# Altium PCB ESP32 with USBC PCB V1.PcbDoc (part 3 of 3)
Units mil, origin at the board's own origin, x right, y up, seen from the top; angles counter-clockwise.
Board outline 2800 x 1000 mil, 4 copper layers (L1, L2, L3, L4), stack 61.583 mil thick; 64 components, 73 nets, 299 pads, 158 vias.
Unrouted connection lines stored in the file: 2.
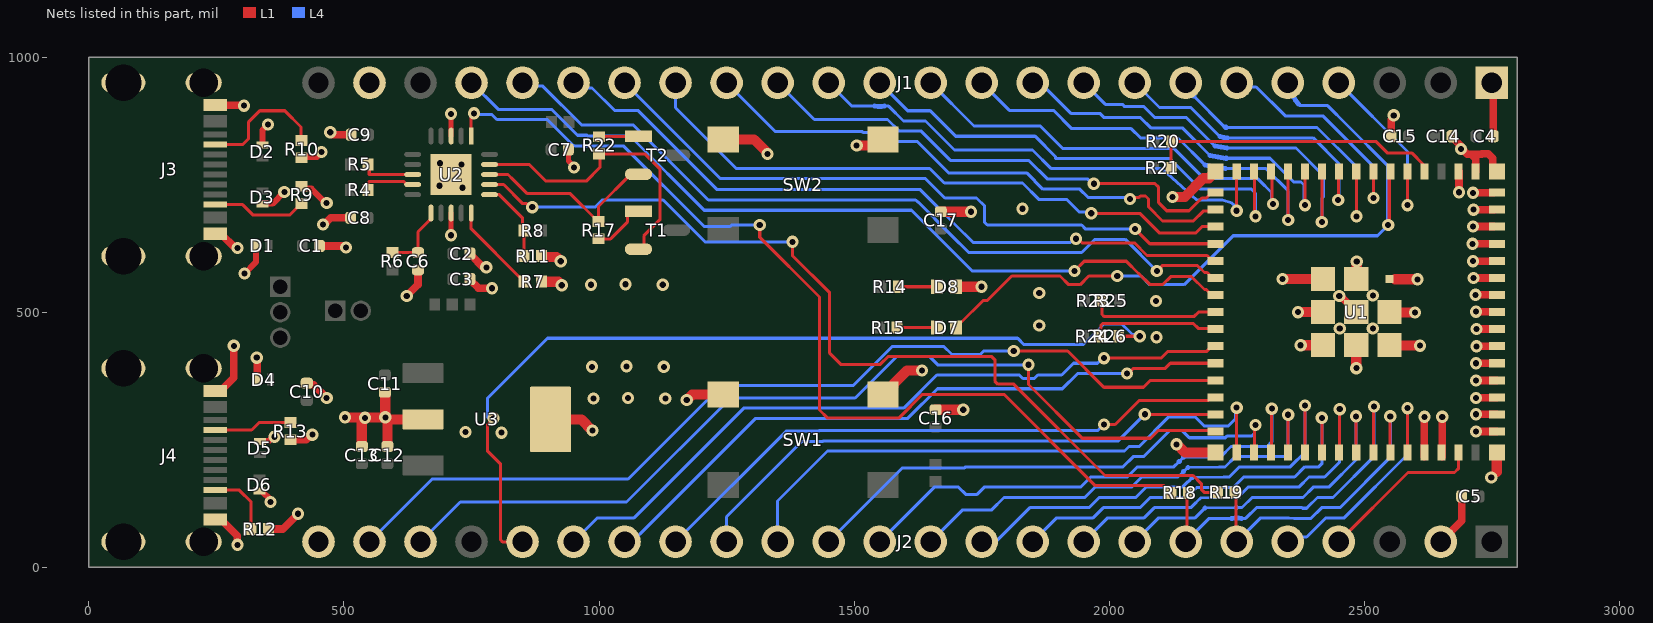
[diagram p4: the nets of this part, all layers, seen from the top]

## Via types
v1: diameter 24, hole 12, L1 to L4, tented both sides, 158 vias

## Nets (pads, with @x,y where several pads share a name; then routed paths per layer and width w, separated by ;. In a path a pad name is that pad's centre, name@x,y a point inside that pad or via, vN(x,y) a via of type N, cw(c..) or ccw(c..) an arc to the next point about the centre after c; other vN are vias at no path point) (continued)
CON_ESP_USB_P: J2.20 R26.1 | length 1733.6
  L1 w6.03: v1(793,292) 793,290.97 781.51,279.48 781.51,227.49 807.01,201.99 807.01,53.53 810.55,50 J2.20@850,50 ; R26.1@2021,453 v1(2059.98,453)
  L4 w6.03: 781,294.03 781,331 899.01,449.01 1820.53,449.01 1832.59,436.95 1949.8,436.95 1989.84,477 2025,477 2045.64,456.36 2056.63,456.36 v1(2059.98,453)
DTR_FTDI: R17.2 T2.2 U2.18 | length 385.9
  L1 w6: U2.18@785.41,770 821.58,770 832,759.58 858.57,733 942.83,733 997.82,678.02 R17.2@999,678.02 999,707.47 1062.12,770.6 T2.2@1077.58,770.6
ESP_USB_N: R23.2 R25.2 U1.23 | length 255.2
  L1 w6.03: R23.2@1986,523 1986,495.56 1989.53,492.03 2167.03,492.03 2175.39,500.39 U1.23@2208.82,500.39
ESP_USB_P: R24.2 R26.2 U1.24 | length 252.3
  L1 w6.03: R26.2@1984,453 1984,474.47 1987.53,478 2165,478 2174.56,468.44 2207.31,468.44 U1.24@2208.82,466.93
"FTDI RESET": C6.2 R6.2 U2.11 | length 138.3
  L1 w6: R6.2@595,617.01 R6.2@595,617.01 644.96,616.97 C6.2@645,616.93 645,657.65 670.63,683.28 U2.11@670.63,694.59
FTDI_USB_N: R4.2 U2.9 | length 105.2
  L1 w6.03: R4.2@547.01,740 546,741.01 546,752.44 549.53,755.97 617.54,755.97 623.19,750.32 U2.9@634.59,750.32
FTDI_USB_P: R5.2 U2.8 | length 106.1
  L1 w6.03: R5.2@547.01,790 549.53,787.48 549.53,770 U2.8@634.59,770
GND: C1.1 C2.1 C3.1 C4.1 C5.1 C6.1 C7.1 C8.1 C9.1 C10.1 C11.1 C12.1 C13.1 C14.1 C15.1 C16.2 C17.1 D1.2 D2.2 D3.2 D4.2 D5.2 D6.2 D8.1 J1.1 J1.23 J2.2 J2.24 J3.A1B12 J3.B1A12 J3.S1 J3.S2 J3.S3 J3.S4 J4.A1B12 J4.B1A12 J4.S1 J4.S2 J4.S3 J4.S4 R7.1 R9.1 R10.1 R11.1 R12.1 R13.1 SW1.3 SW1.4 SW2.3 SW2.4 U1.1 U1.2 U1.42 U1.43 U1.46 U1.47 U1.48 U1.49 U1.50 U1.51 U1.52 U1.53 U1.54 U1.55 U1.56 U1.57 U1.58 U1.59 U1.60 U1.61 U1.62 U1.63 U1.64 U1.65 U1.66 U1.67 U1.68 U1.69 U1.70 U1.71 U1.72 U1.73 U2.3 U2.13 U2.21 U3.2 U3.4 | length 4182.9
  L1 w6: v1@2719,266 v1(2719.14,266.14)
  L1 w10.01: v1(710,651) U2.13@710,694.59 ; U2.3@710,845.41 v1(710,889) ; C7.1@939.93,819 939.93,796.33 951,785.26 v1(951,784)
  L1 w12: v1(305,576) 327.2,598.2 D1.2@327.2,630 ; D6.2@334,149.41 338.92,149.41 356,132.33 v1(356,128) ; D5.2@335,246.59 335.89,247.48 352.23,247.48 360.75,256 v1(364,256) ; D3.2@340,712.2 340.89,713.09 360.09,713.09 v1(383,736) ; D2.2@340,827.8 340,857 v1(351,868) ; R9.1@417,747.01 421.63,742.38 435.85,742.38 464.23,714 v1(466,714) ; R10.1@417,803 418.81,804.81 446.81,804.81 v1(456,814)
  L1 w15: J4.B1A12@247.64,94.09 258.46,94.09 291,61.56 v1(291,44) ; J4.A1B12@247.64,346.06 258.46,346.06 284,371.6 v1(284,434.17) ; J3.B1A12@247.64,653.94 258.46,653.94 286.4,626 v1(291,626) ; J3.A1B12@247.64,905.91 303.09,905.91 v1(304,905) ; v1(329,411) 330.2,409.8 D4.2@330.2,368 ; R12.1@352.01,75 380,75 v1(410,105) ; R13.1@395,249.98 425.55,249.98 435.56,260 v1(438,260) ; C10.1@427,361 430.13,357.87 440.16,357.87 v1(466,332) ; C1.1@451.93,630 498.56,630 501.56,627 v1(504,627) ; v1(459,672) 461.44,672 474.44,685 C8.1@513.07,685 ; v1(473,853) 478,848 C9.1@514.07,848 ; v1(623,532) 645,554 C6.1@645,583.07 ; C3.1@746.93,565 746.93,563.82 763.75,547 v1(790,547) ; C2.1@746.93,615 750.06,611.87 750.06,610.69 771.03,589.72 777.28,589.72 v1(779,588) ; SW2.3@1544.91,827 SW2.3@1556.5,838.58 ; v1(2451,532) 2452.8,532 U1.61@2484.41,500.39 ; C15.1@2553.07,845 2553.07,878.64 2558,883.56 v1(2558,886) ; U1.42@2617.91,217.02 v1@2617.91,294.91 ; J2.2@2650,50 2691.07,91.07 C5.1@2691.07,139 ; U1.43@2652.91,217.02 v1@2652.91,294.91 ; C14.1@2671.93,845 2671.93,843.82 2690,825.75 v1(2690,820) 2692.44,820 2702.44,810 2709.87,810 ; v1(2685.86,735.14) U1.2@2685.86,776 ; v1(2712.14,634.14) U1.57@2753,634.14 ; v1(2713.14,600.14) U1.56@2754,600.14 ; v1(2713.14,668.14) U1.58@2754,668.14 ; v1(2713.14,734.14) U1.60@2754,734.14 ; v1(2714.14,567.14) U1.55@2755,567.14 ; v1(2714.14,701.14) U1.59@2755,701.14 ; v1(2718.14,534.14) U1.54@2759,534.14 ; U1.1@2718.66,775.98 2718.66,801.21 2709.87,810 ; v1(2719.14,266.14) U1.46@2760,266.14 ; v1(2719.14,300.14) U1.47@2760,300.14 ; v1(2719.14,332.14) U1.48@2760,332.14 ; v1(2719.14,366.14) U1.49@2760,366.14 ; v1(2719.14,400.14) U1.50@2760,400.14 ; v1(2719.14,501.14) U1.53@2760,501.14 ; v1(2720.14,433.14) U1.51@2761,433.14 ; v1(2720.14,467.14) U1.52@2761,467.14 ; v1(2749,176) 2760,187 ; J1.1@2750,950 2752.93,947.07 C4.1@2752.93,846.18 ; U1.62@2760,775.98 2751.75,784.23 2751.75,801.75 2742.97,810.54 2730.54,810.54 2730,810 2709.87,810
  L1 w20: v1(502,294) 502.5,293.5 540.5,293.5 v1(541,293) ; C13.1@535,236.93 535,285.92 541,291.92 v1(541,293) ; C11.1@580,343.07 580.37,343.07 581,342.44 v1(581,294) ; C12.1@585,236.93 585,288.92 581,292.92 v1(581,294) ; v1@586.08,290 U3.2@655,290 ; R7.1@887.01,560 920,560 v1(927,553) ; R11.1@887.01,610 887.01,608.82 887.64,608.19 916.81,608.19 v1(925,600) ; U3.4@905,290 965,290 v1(987,268) ; v1(1172,328) 1182.58,338.58 SW1.4@1243.5,338.58 ; SW2.4@1243.5,838.58 1304.02,838.58 1329.23,813.36 1329.23,810.77 v1(1330,810) ; v1(1505,827) SW2.3@1544.91,827 ; SW1.3@1556.5,338.58 1561.42,338.58 1577.01,354.17 1577.01,359.09 1603.91,386 v1(1633,386) ; C16.2@1660,308.93 v1(1713.93,308.93) v1@1715,310 ; C17.1@1670,696.93 v1@1728.93,696.93 ; D8.1@1700,550 v1(1750,550) ; v1(1728.96,696.96) v1(1728.96,696.96) ; v1(2124,726) 2148.27,726 2184.79,762.52 2195.35,762.52 U1.63@2208.82,775.98 ; v1(2132,241) 2133.08,241 2149.28,224.8 U1.64@2208.82,224.8 ; v1(2340,565) 2340.35,565.35 U1.71@2419.45,565.35 ; v1@2370,500 v1(2370.2,500.2) 2370.39,500.39 U1.72@2419.45,500.39 ; v1@2375,435 v1(2375.43,435.43) U1.73@2419.45,435.43 ; v1(2484.57,390.43) U1.70@2484.57,434.45 ; U1.69@2485.43,555.55 v1(2485.43,599.57) ; U1.67@2555.55,499.57 v1(2599.57,499.57) ; 2560.55,564.57 v1(2604.57,564.57) ; U1.68@2565.55,434.57 v1(2609.57,434.57) ; 2760,187 U1.65@2760,224.8 ; v1(541,293) 541.5,293.5 580.5,293.5 v1(581,294) ; v1@1728.93,696.93 v1(1728.96,696.96)
  other v1: 809,264 738,265 2618,295 2653,295 989,331 1130,331 1057,332 986,393 1127,393 1054,394 2093,451 2452,468 2517,468 1863,474 2092,522 2517,533 1863,538 984,554 1125,554 1052,555 1830,703 732,744 687,748 730,790 688,792
GPIO0: R20.2 R21.2 U1.4 | length 579.8
  L1 w6: R21.2@2121.01,783 2121.51,783.5 2121.51,834.5 R20.2@2122.01,835 2522.72,835 2545.1,812.61 2593.01,812.61 2615.39,790.23 2615.39,778.86 U1.4@2618.27,775.98
GPIO1: J1.4 U1.5 | length 362
  L1 w6: U1.5@2584.8,775.98 2585,775.79 v1(2585,710)
  L4 w6: J1.4@2450,950 2585,815 v1(2585,710)
GPIO2: D7.1 J1.5 U1.6 | length 1464.2
  L1 w6: D7.1@1693.19,476.81 D7.1@1700,470 1700,471.97 1706.81,478.78 1708.78,478.78 1753,523 1761.18,523 1809.18,571 1903.82,571 1920.82,554 1943.18,554 1960.18,571 v1(2016,571) ; v1(2547,671) 2549.17,673.17 2549.17,773.74 U1.6@2551.41,775.98
  L4 w6: v1(2016,571) 2062.82,571 2079.82,554 2147,554 2243,650 2526,650 2546.14,670.14 2546.14,787.14 2466.2,867.08 2428.28,905 2374.37,905 2371.44,907.93 2371.14,908.23
  L4 w10: J1.5@2350,950 ccw(c2447.88,973.31) 2371.14,908.23
GPIO3: J1.6 U1.7 | length 450.4
  L1 w6: v1(2518,724) 2517.94,724.06 2517.94,775.72 U1.7@2518,775.79
  L4 w6: J1.6@2250,950 2258.23,941.77 2288.23,941.77 2345,885 2420,885 2420,884 2518,786 v1(2518,724)
GPIO4: J1.7 U1.8 | length 592.4
  L1 w6: U1.8@2484.41,775.98 2484.7,775.69 2484.7,688.3 v1(2485,688)
  L4 w6: J1.7@2150,950 2163,926.7 2165.93,923.77 2226.85,862.85 ; 2230.21,862.33 2407.67,862.33 2485,785 v1(2485,688)
  L4 w10: 2226.85,862.85 ccw(c2281.63,1206.43) 2230.21,862.33
GPIO5: J1.8 U1.9 | length 594.4
  L1 w6: v1(2449,720) 2449.97,720.97 2449.97,774.76 U1.9@2451,775.79
  L4 w6: J1.8@2050,950 2095.64,904.36 2098.57,901.43 2159.99,901.43 2217.23,844.19 ; 2232.13,841.86 2399.86,841.86 2451,790.72 2451,722 v1(2449,720)
  L4 w10: 2217.23,844.19 ccw(c2281.63,1206.43) 2232.13,841.86
GPIO6: J1.9 U1.10 | length 732.5
  L1 w6: v1(2417,677) 2417.24,677.24 2417.24,772.67 U1.10@2417,772.91
  L4 w6: J1.9@1950,950 1992.5,907.5 2026.03,907.5 2030.53,903 2068.43,903 2090,881.43 2151.7,881.43 2207.47,825.67 ; 2230.8,821.86 2366.14,821.86 2420,768 2420,725.89 2417,722.89 v1(2417,677)
  L4 w10: 2207.47,825.67 ccw(c2281.63,1206.43) 2230.8,821.86
GPIO7: J1.10 U1.11 | length 719.3
  L1 w6: v1(2384,710) U1.11@2384,775.79
  L4 w6: J1.10@1850,950 1864.61,950 1880.35,934.27 1880.73,934.27 1925,890 1981.72,890 1990.14,881.57 2061.57,881.57 2081.72,861.43 2143.42,861.43 2197.59,807.26 ; 2229.5,801.86 2315.43,801.86 2361.59,755.69 2376.14,755.42 2382,749.56 2382,712 v1(2384,710)
  L4 w10: 2197.59,807.26 ccw(c2281.63,1206.43) 2229.5,801.86
GPIO8: J1.11 U1.12 | length 838.7
  L1 w6: U1.12@2350.41,775.98 2350.78,775.62 2350.78,681.22 v1(2351,681)
  L4 w6: J1.11@1750,950 1804.28,895.72 1891,895.72 1926.72,860 2043.22,860 2061.78,841.43 2135.14,841.43 2187.6,788.97 ; 2228.23,781.86 2228.86,781.86 2307.14,781.86 2351,738 v1(2351,681)
  L4 w10: 2187.6,788.97 ccw(c2281.63,1206.43) 2228.23,781.86
GPIO9: J1.12 U1.13 | length 846.9
  L1 w6: U1.13@2317.09,775.98 2319.04,774.03 2319.04,713.96 v1(2321,712)
  L4 w6: J1.12@1650,950 1735,865 1865,865 1908.57,821.43 2126.85,821.43 2186.43,761.86 2291.14,761.86 2294.07,758.93 2318.32,734.68 2318.32,714.68 v1(2321,712)
GPIO10: J1.13 U1.14 | length 963.4
  L1 w6: U1.14@2283.62,775.98 2285.31,774.3 2285.31,689.69 v1(2287,688)
  L4 w6: J1.13@1550,950 1605,895 1649,895 1699,845 1855,845 1895,805 1895,801.43 2118.57,801.43 2178.14,741.86 2278.14,741.86 2287,733 v1(2287,688)
GPIO11: J1.14 U1.15 | length 980.9
  L1 w6: v1@2250.09,699.09 U1.15@2250.09,776.98
  L4 w6: J1.14@1450,950 1493.07,906.93 1496,904 1540.36,904 ; 1559.64,904 1567.72,904 1596.72,875 1640,875 1642.93,872.07 1696.78,818.22 1849.93,818.22 1886.72,781.43 1890,781.43 2103.53,781.43 2171.93,720 2221.99,720 2240.61,714.25 2243.43,711.43 v1(2250,699)
  L4 w10: 1540.36,904 ccw(c1550,950) 1559.64,904
GPIO12: J1.15 U1.16 | length 995.2
  L1 w6: v1(1970,752) 2090,752 2097,745 2097,714.82 2112.82,699 2156.62,699 2181.68,724.06 2190.35,724.06 2200.94,734.65 U1.16@2208.82,734.65
  L4 w6: J1.15@1350,950 1422,878 1565.43,878 1588.43,855 1631.72,855 1688.5,798.22 1689.28,797.43 1842.43,797.43 1878.43,761.43 1957.14,761.43 1966.57,752 v1(1970,752)
GPIO13: J1.16 U1.17 | length 1094.2
  L1 w6: v1(2041,722) 2043.68,724.68 2057.96,724.68 2061.14,727.86 2071.14,727.86 2077,722 2077,706.53 2104.53,679 2164.91,679 2184.21,698.31 2205.94,698.31 U1.17@2208.82,701.18
  L4 w6: J1.16@1250,950 1346,854 1516.18,854 1518.18,852 1563.15,852 1580.15,835 1623.43,835 1680.22,778.22 1685.14,773.29 1838.29,773.29 1870.15,741.43 1942.38,741.43 1958.82,725 2014.21,725 2014.53,724.68 2038.32,724.68 v1(2041,722)
GPIO14: J1.17 U1.18 | length 1215
  L1 w6: v1(1965,694) 2060,694 2099,655 2169.19,655 2181.91,667.72 U1.18@2208.82,667.72
  L4 w6: J1.17@1150,950 1150,901 1269,782 1648.15,782 1676.86,753.29 1830.01,753.29 1861.86,721.43 1916.57,721.43 1941.32,696.68 1962.32,696.68 v1(1965,694)
GPIO15: J1.18 U1.19 | length 1308.8
  L1 w6: v1(2051,663) 2079.75,634.25 U1.19@2208.82,634.25
  L4 w6: J1.18@1050,950 1238,762 1639.86,762 1677.9,723.96 1740.15,723.96 1755.96,708.15 1755.96,685.78 1755.33,685.14 1755.33,676.86 1761.18,671 1946.18,671 1954.18,663 v1(2051,663)
GPIO16: J1.19 U1.20 | length 1410.4
  L1 w6: v1(1935,644) 1938.79,644 1946.79,636 2049.72,636 2074.34,611.38 2192.21,611.38 2198.07,605.52 2198.07,603.66 2200.94,600.79 U1.20@2208.82,600.79
  L4 w6: J1.19@950,950 960.23,939.77 986.23,939.77 1030.14,895.86 1075.86,895.86 1230.72,741 1629,741 1698,672 1733,637 1924.21,637 1931.21,644 v1(1935,644)
GPIO17: J1.20 U1.21 | length 1548.6
  L1 w6: v1(2093.48,581) 2103.86,591.38 2173.39,591.38 2186.86,577.91 2192.21,577.91 2198.07,572.06 2198.07,570.2 2200.94,567.32 U1.21@2208.82,567.32
  L4 w6: J1.20@850,950 856.73,943.27 889.73,943.27 966,867 1067.36,867 1214.36,720 1620.64,720 1624.64,716 1625.72,716 1689.72,652 1724.72,617 1946.18,617 1962,632.82 1972.18,643 2031.48,643 v1(2093.48,581)
GPIO18: J1.21 U1.22 | length 1659.6
  L1 w6: v1(1932,581) 1951,600 2033.82,600 2057.67,576.14 2058.14,576.14 2080.28,554 2104.66,554 2120.48,569.82 2161.49,569.82 2186.86,544.45 2190.35,544.45 2198.07,536.73 2205.94,536.73 U1.22@2208.82,533.86
  L4 w6: J1.21@750,950 802.25,897.75 906.97,897.75 957.72,847 976,847 977.5,845.5 1060.57,845.5 1206.07,700 1612.36,700 1731.36,581 v1@1931.53,581
GPIO21: J2.19 U1.25 | length 1423.5
  L1 w6: v1(1990,410) 2101.72,410 2114.59,422.87 2190.35,422.87 2198.07,430.59 2205.94,430.59 U1.25@2208.82,433.46
  L4 w6: J2.19@950,50 997,97 1068.72,97 1283.72,312 1597.18,312 1662.18,377 1823.82,377 1830.82,370 1853.18,370 1860.18,377 1907,377 1930,400 1977.14,400 1987.14,410 v1(1990,410)
GPIO26: J2.18 U1.26 | length 1303.8
  L1 w6: v1(2035,380) 2037.86,380 2047.86,390 2110,390 2120,400 U1.26@2208.82,400
  L4 w6: J2.18@1050,50 1064.61,50 1080.35,65.73 1080.73,65.73 1307,292 1605.47,292 1663.47,350 1908.28,350 1938.28,380 v1(2035,380)
GPIO33: J2.17 U1.28 | length 1176.1
  L1 w6: v1(1990,280) 2011.82,280 2058.82,327 2194.87,327 2200.94,333.07 U1.28@2208.82,333.07
  L4 w6: J2.17@1150,50 1367,267 1430.43,267 1431.43,268 1977.14,268 1989.14,280 v1(1990,280)
GPIO34: J2.16 U1.29 | length 1091.2
  L1 w6: v1(2070,300) 2070.39,299.61 U1.29@2208.82,299.61
  L4 w6: J2.16@1250,50 1250,99 1398,247 1438.72,247 1439.72,248 2018,248 v1(2070,300)
GPIO35: J2.15 U1.31 | length 1170.5
  L1 w6: v1(2250,313) 2250.08,312.92 2250.08,224.88 U1.31@2250.16,224.8
  L4 w6: J2.15@1350,50 1350,130 1448,228 2030.01,228 2039.01,237 2059,237 2117,295 2168.43,295 2186.43,277 2233.72,277 2247.32,290.61 2247.32,310.32 v1(2250,313)
GPIO36: J2.14 U1.32 | length 998.7
  L1 w6: U1.32@2284,233.21 2285.31,234.52 2285.31,277.31 v1(2287,279)
  L4 w6: J2.14@1450,50 1595,195 1716.82,195 1718.82,197 2027.29,197 2047.29,217 2067.28,217 2118.28,268 2143.18,268 2157.18,254 2227.73,254 2230.73,257 2279.1,257 2284.96,262.86 2284.96,276.96 v1(2287,279)
GPIO37: J2.13 U1.33 | length 1005
  L1 w6: U1.33@2317.59,233.02 2318.04,233.47 2318.04,310.04 v1(2319,311)
  L4 w6: J2.13@1550,50 1657,157 1704.82,157 1718.82,143 1741.18,143 1755.18,157 1943.86,157 1963.86,177 2035.58,177 2055.58,197 2126.86,197 2137.36,207.49 2146.28,215.99 ; 2146.33,216 2207.45,216.56 2218.69,216.68 2239.01,237 2310.14,237 2319,245.86 v1(2319,311)
GPIO38: J2.12 U1.34 | length 914.1
  L1 w6: U1.34@2351,233.21 v1(2351,299)
  L4 w6: J2.12@1650,50 1712,112 1769,112 1794,137 1952.15,137 1972.15,157 2043.86,157 2063.86,177 2135.15,177 2145.63,187.48 2154.58,196 2215.82,196.65 2227.06,196.77 2247.29,217 2345.14,217 2351,222.86 v1(2351,299)
GPIO39: J2.11 U1.35 | length 881.8
  L1 w6: v1(2384,317) 2384.01,233.6 U1.35@2384.59,233.02
  L4 w6: J2.11@1750,50 1777.45,50 1844.45,117 1960.43,117 1980.43,137 2052.15,137 2072.15,157 2143.43,157 2153.91,167.48 2155.86,169 2162.86,176 ; 2162.9,176 2224.19,176.74 2235.43,176.85 2255.58,197 2355.29,197 2384,225.71 v1(2384,317)
GPIO40: J2.10 U1.36 | length 785.8
  L1 w6: U1.36@2417,227.21 v1(2417,293)
  L4 w6: J2.10@1850,50 1897,97 1968.72,97 1988.72,117 2060.43,117 2080.43,137 2151.72,137 2162.2,147.48 2164.15,149 2171.15,156 2232.56,156.82 2243.8,156.94 2246.69,159.83 2263.86,177 2363.58,177 2383.58,197 2411.14,197 2417,202.86 v1(2417,293)
GPIO41: J2.9 U1.37 | length 752.7
  L1 w6: U1.37@2450.97,227.45 2451.47,227.95 2451.47,309.47 v1(2452,310)
  L4 w6: J2.9@1950,50 1997,97 2068.72,97 2088.72,117 2160,117 2169.48,126.48 2171.43,128 2179.43,136 2240.93,136.91 2249,136.99 ; 2249.09,137 2252.17,137.03 2272.15,157 2371.86,157 2391.86,177 2422.43,177 2452,206.57 v1(2452,310)
  L4 w10: 2249,136.99 cw(c2250,50) 2249.09,137
GPIO42: J2.8 U1.38 | length 651.4
  L1 w6: U1.38@2484,230.21 v1(2484,296)
  L4 w6: J2.8@2050,50 2097,97 2168.72,97 2187.72,116 ; 2187.76,116 2248.85,116.99 ; 2249.3,117 2260.55,117.11 2280.43,137 2380.15,137 2400.15,157 2430.72,157 2484,210.28 v1(2484,296)
  L4 w10: 2248.85,116.99 cw(c2250,50) 2249.3,117
GPIO45: J2.5 U1.41 | length 478.1
  L1 w6: U1.41@2585,230.8 2584.9,230.9 2584.9,311.9 v1(2585,312)
  L4 w6: J2.5@2350,50 2359.23,59.23 2387.23,59.23 2425,97 2461,97 2585,221 v1(2585,312)
GPIO46: J2.4 U1.44 | length 325.6
  L1 w6: J2.4@2450,50 2585.81,185.81 2676.95,185.81 2685.2,194.06 U1.44@2685.2,224.8
GPIO47: J2.23 U1.27 | length 1862
  L1 w6: v1(1813,424) 1918.68,424 1989.68,353 2067.36,353 2080.89,366.54 U1.27@2208.82,366.54
  L4 w6: J2.23@550,50 673,173 1057,173 1240,356 1497.72,356 1574.72,433 1675.86,433 1691.86,417 1747.03,417 1754.03,424 v1(1813,424)
GPIO48: J2.22 U1.30 | length 1805.1
  L1 w6: v1(1842,397) 1842,358.28 1947.28,253 2080.94,253 2095.94,268 2206.96,268 U1.30@2208.82,266.14
  L4 w6: J2.22@650,50 728,128 1054,128 1258,332 1502,332 1583,413 1648.04,413 1664.04,397 v1(1842,397)
NetD7_2: D7.2 R15.1 | length 78.6
  L1 w6: R15.1@1584.02,470 D7.2@1662.6,470
NetD8_2: D8.2 R14.1 | length 75.6
  L1 w6: R14.1@1587.01,550 D8.2@1662.6,550
NetJ3_A5: J3.A5 R10.2 | length 254.5
  L1 w6: J3.A5@247.64,829.13 301.87,829.13 313.19,840.46 313.19,873.19 335,895 384,895 415.82,863.18 415.82,838.2 R10.2@417,837.02
NetJ3_B5: J3.B5 R9.2 | length 187.3
  L1 w6: J3.B5@247.64,711.02 301.27,711.02 321.98,690.31 393.14,690.31 415.82,712.99 R9.2@417,712.99
NetJ4_A5: J4.A5 R13.2 | length 153.5
  L1 w6: J4.A5@247.64,269.29 318.93,269.29 333.63,284 R13.2@395,284
NetJ4_B5: J4.B5 R12.2 | length 133
  L1 w6: J4.B5@247.64,151.18 294.82,151.18 317.99,128.01 R12.2@317.99,75
NetR7_2: R7.2 U2.15 | length 178.2
  L1 w6: U2.15@749.37,694.59 749.37,663.62 846.18,566.81 847.36,566.81 852.99,561.18 R7.2@852.99,560
NetR17_1: R17.1 T1.1 | length 109.7
  L1 w6: R17.1@999,644 1022.75,644 1055.44,676.69 1055.44,692.14 1061.7,698.4 T1.1@1077.15,698.4
NetR22_2: R22.2 T2.1 | length 78.2
  L1 w6: R22.2@1000,844.02 1000.69,844.71 1076.88,844.71 T2.1@1077.58,845.4
RTS_FTDI: R22.1 T1.2 U2.19 | length 573.4
  L1 w6: U2.19@785.41,789.68 863.22,789.68 895.91,757 975,757 1002,784 R22.1@1002,806.82 ; R22.1@1000,810 1090.78,810 1119.3,781.48 1119.3,681.35 1087.83,649.88 1087.83,629.38 1082.04,623.6 T1.2@1077.15,623.6
RXD_FTDI: R18.2 U2.1 | length 1906.3
  L1 w6: U2.1@749.37,845.41 749.37,884.37 v1(755,890) ; v1(1315,671) 1315,647 1432,530 1432,308.31 1447.31,293 1588.23,293 1634.23,339 1794,339 1973.03,159.97 2107.02,159.97 2114.18,152.81 2115.36,152.81 2120.99,147.18 R18.2@2120.99,146
  L4 w6: v1(755,890) 757,888 757.68,887.32 790.05,887.32 799.62,877.75 837,877.75 898.68,877.75 949.43,827 951,827 952.5,825.5 1048.5,825.5 1206,668 1257.11,668 1260.11,671 v1(1315,671)
TXD_FTDI: R19.2 U2.17 | length 1806.3
  L1 w6: U2.17@796.94,750.32 812.97,750.32 850.28,713 858.21,713 865.21,706 v1(869,706) ; v1(1379,638) 1379,611.28 1452,538.28 1452,419.82 1473.82,398 1551.5,398 1566.5,413 1770.14,413 1776,407.14 1776,364.86 1781.86,359 1813,359 1992.03,179.97 2164.69,179.97 2180.64,164.02 2180.64,152.86 2186.5,147 R19.2@2212.99,147
  L4 w6: v1(869,706) 992.25,706 1006.25,720 1125.72,720 1207.72,638 v1(1379,638)
U0RXD: J2.6 R19.1 U1.40 | length 615.1
  L1 w6: R19.1@2247.01,147 2248.5,145.5 2248.5,51.5 J2.6@2250,50 ; U1.40@2551,230.21 v1(2551,296)
  L4 w6: J2.6@2250,50 2297,97 2352.98,97 2362.38,95.8 2370.67,95.8 2395.52,95.8 2416.72,117 2452.72,117 2551.36,215.64 2551.36,295.64 v1(2551,296)
U0TXD: J2.7 R18.1 U1.39 | length 720.9
  L1 w6: J2.7@2150,50 2152.5,52.5 2152.5,143.5 R18.1@2155.01,146 ; U1.39@2517.59,230.02 2518.44,230.86 2518.44,314.44 v1(2519,315)
  L4 w6: J2.7@2150,50 2196,96 2240.36,96 ; 2259.64,96 2267.72,96 2288.72,117 2377.75,117 2378.95,115.8 2387.23,115.8 2389.95,118.52 2408.43,137 2439,137 2519,217 v1(2519,315)
  L4 w10: 2240.36,96 cw(c2250,50) 2259.64,96
VBUS_SENSE: R8.1 R11.2 U2.16 | length 159.7
  L1 w6: U2.16@785.41,730.63 804.37,730.63 832,703 849.67,685.33 849.67,663.32 R8.1@852.99,660 R11.2@852.99,610
pads on no net: J1.24 J3.A8 J3.B8 J4.A8 J4.B8 U2.2 U2.4 U2.5 U2.6 U2.7 U2.14

## Polygon pours and split planes (outlines as drawn)
GND on L1 "GND_L01_P011" (solid, pour order 11): 856,489 857,488 1144,488 1144,97 1040,201 860,201 860,320 857,323 718.5,304.5 709,299 702,256 610,256 605,261 601,257 601,227 488,227 486,229 491,234 491,360 497,354 600,354 605,349 607.5,346.5 636,354 709,354
GND on L1 "GND_L01_P010" (solid, pour order 10): 2328.46,606.46 2338,616 2616,616 2623,609 2623,376 2622,377 2327.49,377
+5V_VBUS2 on L1 "+5V_VBUS2_L01_P007" (solid, pour order 7): 347.56,379.76 363,393 363,429 356.5,433.5 353,457 358,465 363,470 385,470 393,460 396,457 396,439 386,429 386,374 385,373 385,350 388,347 411,347 410,346 415,341 429,341 431,339 436,339 442,333 442,320 435,313 419,313 413,319 405,319 399,325 380,325 355,300 354,301 313,301 313,327 314,326 346,326 349,329
+5V_VBUS1 on L1 "+5V_VBUS1_L01_P006" (solid, pour order 6): 347,672 346,671 346,530 399,529 429,550 429,671 406,671
+5V on L1 "+5V_L01_P004" (solid, pour order 4): 613,404 699,404 699,361 698,360 610,360 610,368 608,370 595,370 595,369 590,364 569,364 569,367 567,369 537,369 537,371 416,492 396,492 396,488 386,478 364,478 353,489 353,508 365,520 365,523 390,523 390,520 401,509 421,509 544,386 565,386 569,390 592,390 595,387 613,387
3.3V_REG on L1 "3.3V_REG_L01_P003" (solid, pour order 3): 463.2,147.2 495,176 499,176 520,176 521,177 521,214 612,214 612,218 614,220 696,220 696,178 617,178 589,150 506,150 477.5,121.5 462.25,136.75
+3V3_FTDI on L1 "+3V3_FTDI_L01_P002" (solid, pour order 2): 608,571 608,594 571.44,594 556.49,607.46 558,640.09 589,639 612.44,660.49 617.27,670.68 589.96,691.84 602,740 601,741 583.27,738.05 547.66,699.18 544,699 535,694.6 535,591 538,591 558,571
+3V3_FTDI on L1 "+3V3_FTDI_L01_P001" (solid, pour order 1): 917,806.01 917,895 855,895 817,857 817,815 825,807
+3V3 on L1 "+3V3_L01_P000" (solid, pour order 0): 2586,864 2572,864 2572,831 2650,831 2652,833 2652,859 2649,862 2649,871 2652,877.2 2653.5,880.5 2652,889 2645,896 2635,896 2628.5,891.5 2622,885 2617,885 2608,894 2588.5,894 2585.83,876.17 2591,871 2591,865
GND on L2 "GND_L02_P014" (solid, remove dead copper, pour order 14): 13,988 13,9 16,12 2792,12 2792,980 2780,992 12,992 12,989
+3V3 on L2 "+3V3_L02_P012" (solid, pour order 12): 2792,12 2792,984 2788,980 919,980 919,910 1202,627 1202,626 1203,626 1244,585 1244,422 1248,418 1301,418 1301,629 1096,834 1100,838 1396,838 1396,478 1702,172 1703,172 1729,146 1761,178 1761,198 1455,504 1561,610 1561,827 1897,827 1985,739 2607,739 2610,742 2625,727 2625,251 2624,252 2623,251 2454,251 2454,121 2405,72 2405,14 2791,14
3.3V_REG on L2 "3.3V_REG_L02_P013" (solid, pour order 13): 606,217 613,224 703,224 703,133 498,133 475,110 475,111 449,137 497,185 497,217
GND on L3 (split plane): 2799.95,0.05 0.05,0.05 0.05,999.95 2799.95,999.95

## Silkscreen, mask and mechanical layers (free items; w line width, h text height)
Top Overlay:
  text "J1" at 2386,846 h40
  text "POWER" at 1701,592 h40
  text "BOOT" at 1325.22,565.74 h40
  text "UART" at 5,493 h40
  text "5V" at 246,481 h40
  text "USB2" at 171,426 h40
  text "ESP" at 11,423 h40
  text "REG1" at 436,408 h40
  text "USER" at 1709,388 h40
  text "RESET" at 1320.22,385.74 h40
  text "J2" at 2405,93 h40
Bottom Overlay:
  text "NC" at 472,876 h40 r90
  text "GND" at 572,876 h40 r90
  text "5V" at 672,876 h40 r90
  text "IO18" at 772,876 h40 r90
  text "IO17" at 872,876 h40 r90
  text "IO16" at 972,876 h40 r90
  text "IO15" at 1072,876 h40 r90
  text "IO14" at 1172,876 h40 r90
  text "IO13" at 1272,876 h40 r90
  text "IO12" at 1372,876 h40 r90
  text "IO11" at 1472,876 h40 r90
  text "IO10" at 1572,876 h40 r90
  text "IO9" at 1672,876 h40 r90
  text "IO8" at 1772,876 h40 r90
  text "IO7" at 1872,876 h40 r90
  text "IO6" at 1972,876 h40 r90
  text "IO5" at 2072,876 h40 r90
  text "IO4" at 2172,876 h40 r90
  text "IO3" at 2272,876 h40 r90
  text "IO2" at 2372,876 h40 r90
  text "IO1" at 2472,876 h40 r90
  text "IO0" at 2572,876 h40 r90
  text "3V3" at 2672,876 h40 r90
  text "GND" at 2772,876 h40 r90
  text "(C) 2024 SHIVAM" at 1814,496 h40
  text "USB+" at 870,250 h60 r90
  text "USB-" at 770,245 h60 r90
  text "GND" at 470,230 h60 r90
  text "3V3" at 2770,227 h60 r90
  text "EN" at 2570.67,226 h60 r90
  text "GND" at 2670,226 h60 r90
  text "IO48" at 670,222 h60 r90
  text "IO34" at 1275,222 h60 r90
  text "IO37" at 1565,222 h60 r90
  text "IO40" at 1870,222 h60 r90
  text "TXD" at 2170.67,222 h60 r90
  text "IO46" at 2470,222 h60 r90
  text "IO47" at 570,221 h60 r90
  text "IO26" at 1075,221 h60 r90
  text "IO33" at 1175,221 h60 r90
  text "IO35" at 1365,221 h60 r90
  text "IO36" at 1465,221 h60 r90
  text "IO38" at 1670,221 h60 r90
  text "IO39" at 1770,221 h60 r90
  text "IO41" at 1970,221 h60 r90
  text "IO42" at 2070,221 h60 r90
  text "RXD" at 2270.67,221 h60 r90
  text "IO45" at 2370,221 h60 r90
  text "IO21" at 970,217 h60 r90
Board Shape:
  the board outline again, w20

## Text inside footprints (layer, text, board x,y; h text height)
J1: Bottom Overlay "1" at 2732,1016 h40 r270
J2: Bottom Overlay "1" at 2736,-59 h40 r270
J5: Top Overlay "1" at 487,564 h40 r90
J6: Top Overlay "1" at 302,535 h40